# EAGLE board Qwiic_UV_Sensor_VEML6075-2-Panel (EAGLE 9.0.0)
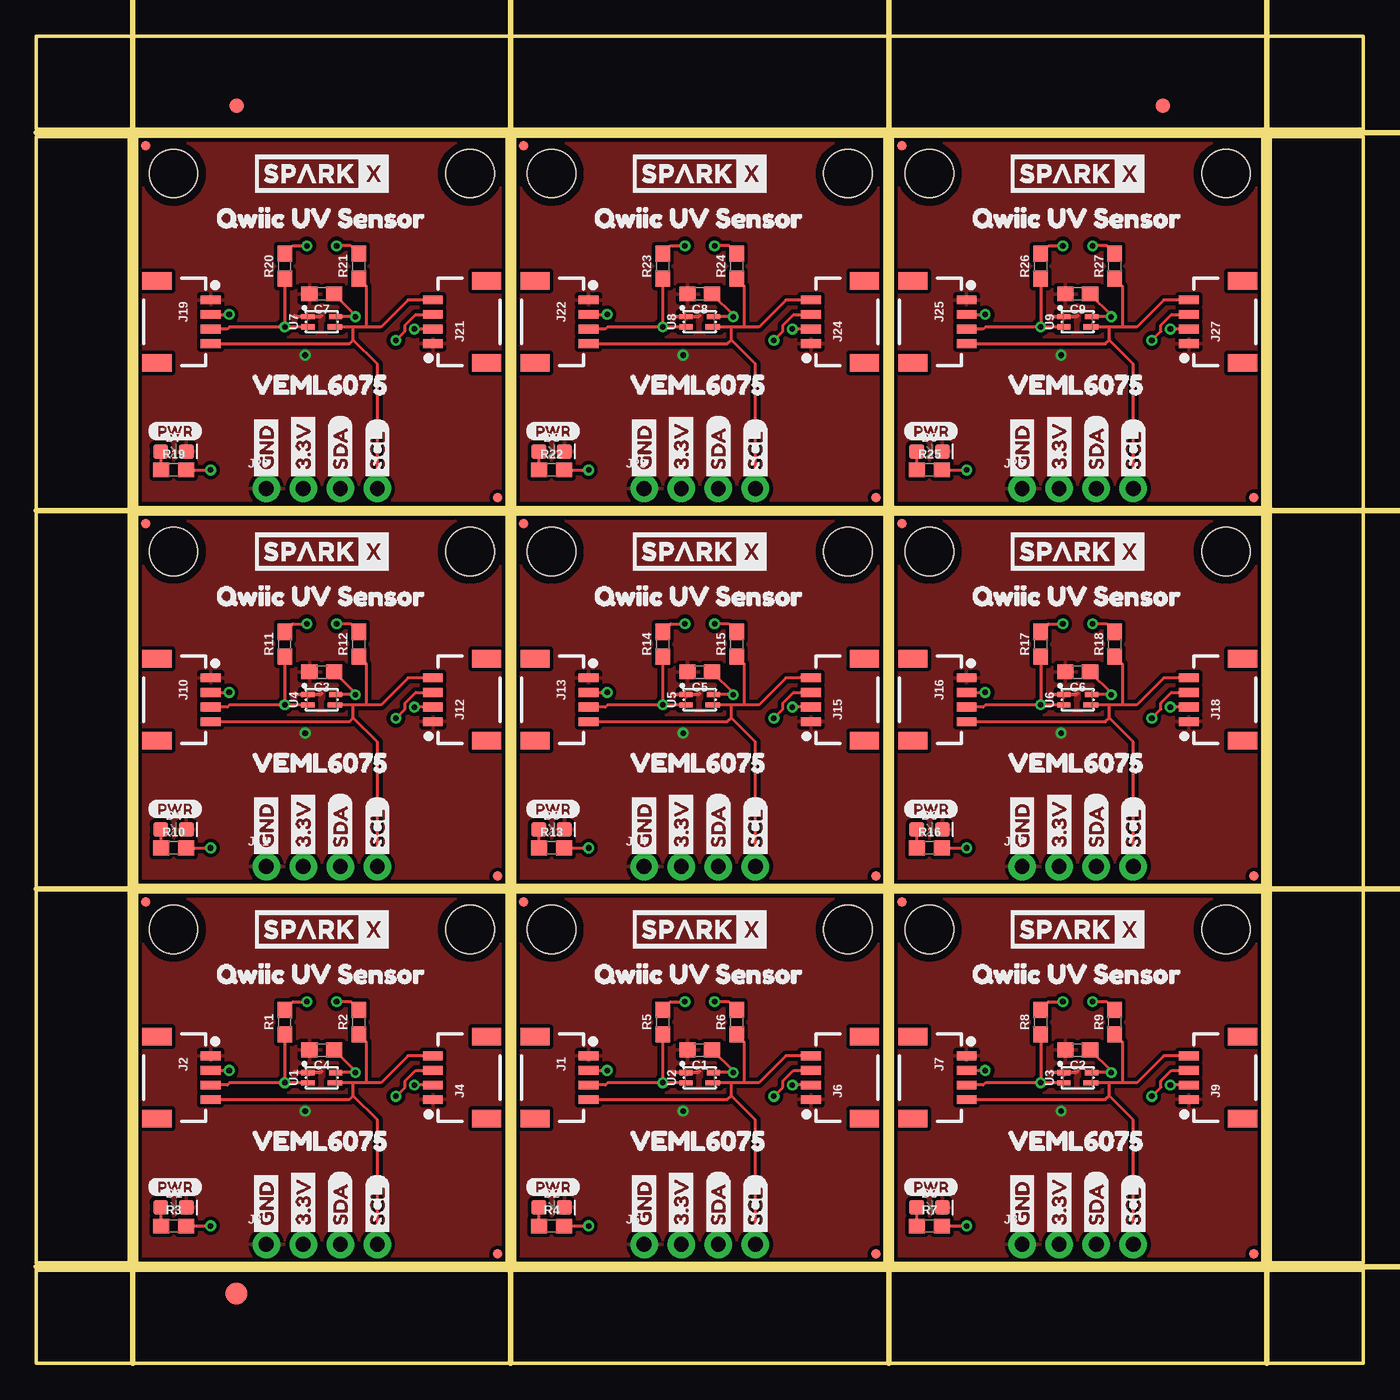
[diagram p0: board, top side]
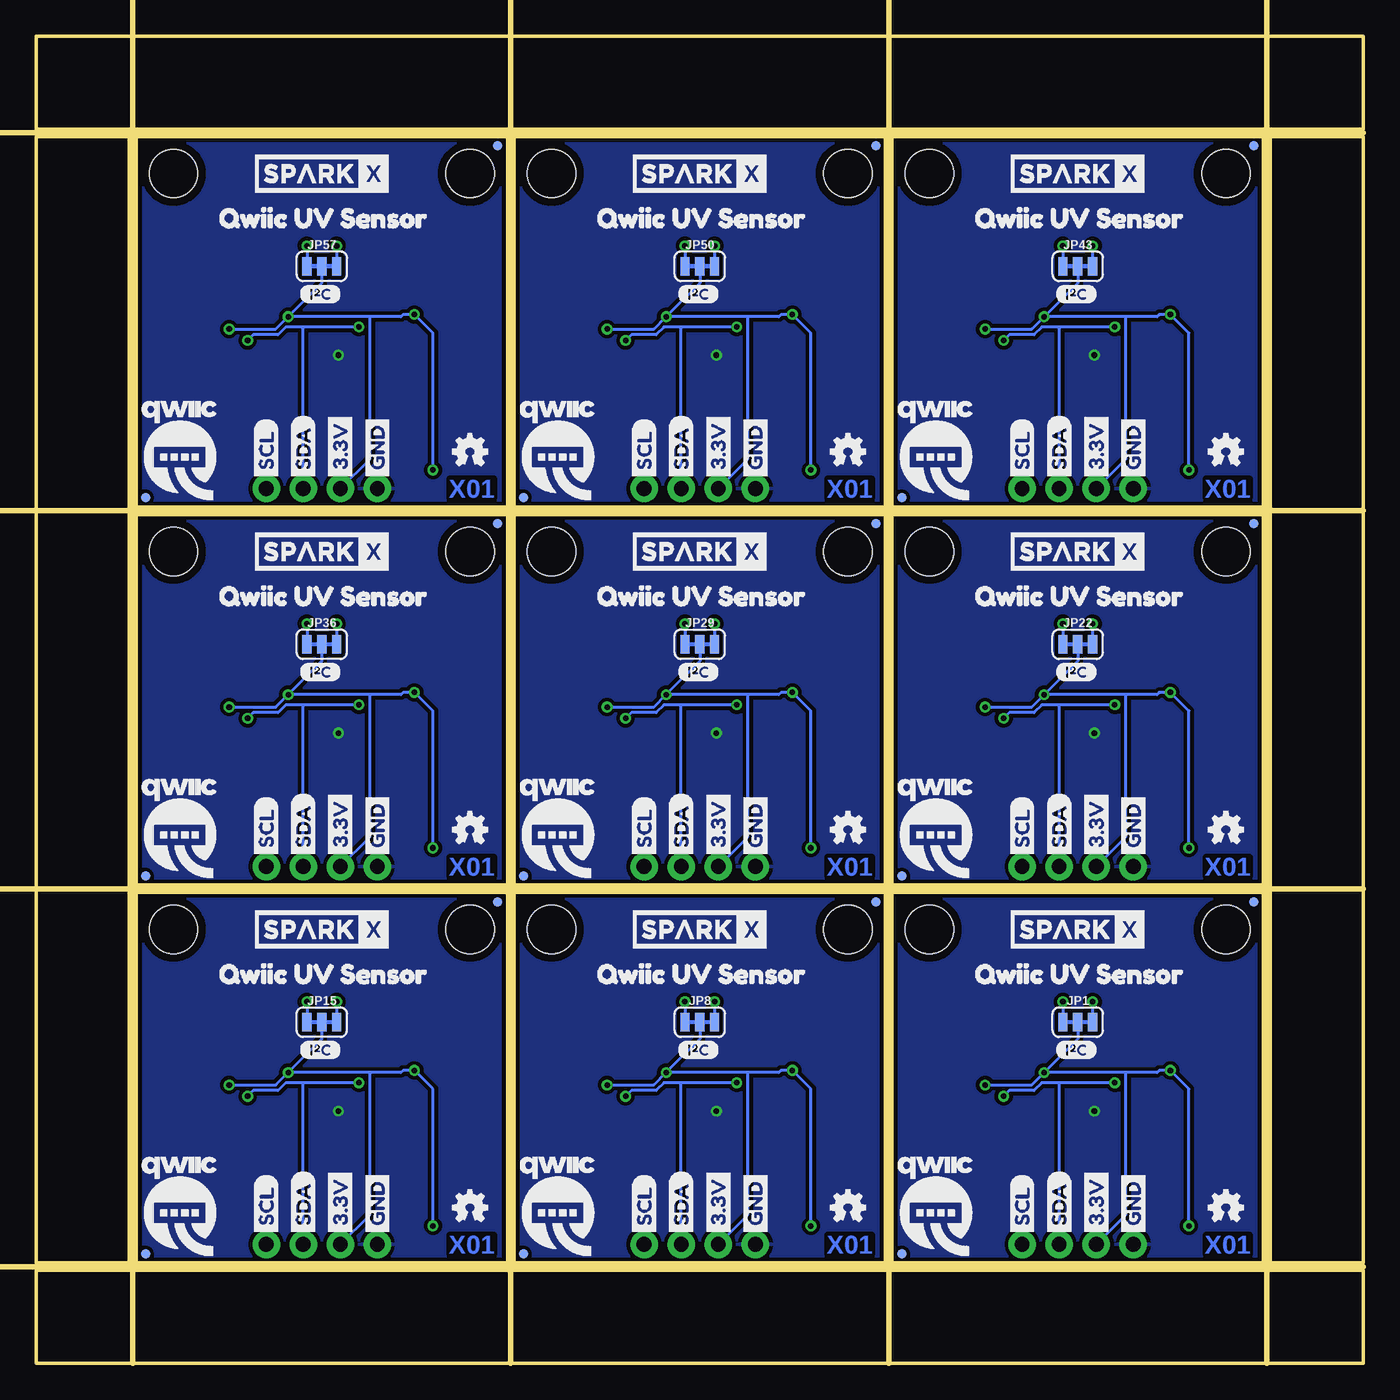
[diagram p1: board, bottom side, seen from below]

Size 90.93 x 90.93 mm. Coordinates in mm from the lower left corner, seen from the top.
Outline: 6.86,6.86 32.26,6.86 32.26,32.26 6.86,32.26 6.86,6.86
Outline: 32.77,6.86 58.17,6.86 58.17,32.26 32.77,32.26 32.77,6.86
Outline: 58.67,6.86 84.07,6.86 84.07,32.26 58.67,32.26 58.67,6.86
Outline: 6.86,32.77 32.26,32.77 32.26,58.17 6.86,58.17 6.86,32.77
Outline: 32.77,32.77 58.17,32.77 58.17,58.17 32.77,58.17 32.77,32.77
Outline: 58.67,32.77 84.07,32.77 84.07,58.17 58.67,58.17 58.67,32.77
Outline: 6.86,58.67 32.26,58.67 32.26,84.07 6.86,84.07 6.86,58.67
Outline: 32.77,58.67 58.17,58.67 58.17,84.07 32.77,84.07 32.77,58.67
Outline: 58.67,58.67 84.07,58.67 84.07,84.07 58.67,84.07 58.67,58.67
Outline: 0,6.35 90.93,6.35 90.93,0 0,0 0,6.35
Outline: 84.58,84.07 90.93,84.07 90.93,6.86 84.58,6.86 84.58,84.07
Outline: 0,90.93 90.93,90.93 90.93,84.58 0,84.58 0,90.93
Outline: 0,84.07 6.35,84.07 6.35,6.86 0,6.86 0,84.07
Copper layers (1*16): Top 0.035mm / dielectric 1.5mm / Bottom 0.035mm
Design rules "SparkFun-2-layer-PCBWay-LIMIT": minimum track width 6mil, minimum drill 0.3mm, track to track 6mil, track to pad 6mil, pad to pad 6mil, via to via 6mil, smd to smd 6mil, copper to edge 6mil, drill to drill 6mil, minimum pad ring 7mil, minimum via ring 7mil, stop-mask expansion 4mil, vias tented up to drill 25mil, thermal gap 10mil
Milling: 8 lines

## Footprints (pad centres in the part's own frame; a part is rotated, then mirrored left to right if it is on the bottom)
0603 = smd 1.1 x 1: 1 -0.85,0; 2 0.85,0
LED-0603 = smd 1 x 1: A -0.877,0; C 0.877,0
FIDUCIAL-1X2 = smd 1 x 1: 1 0,0
FIDUCIAL-1.5X3 = smd 1.5 x 1.5: 1 0,0
1X04_1MM_RA = smd 0.6 x 1.35: 1 -1.5,0; 2 -0.5,0; 3 0.5,0; 4 1.5,0 | smd 1.2 x 2: NC1 2.8,-3.675; NC2 -2.8,-3.675
1X04_NO_SILK = drill 1.016 pad 1.88: 1 0,0; 2 2.54,0; 3 5.08,0; 4 7.62,0
SMT-JUMPER_3_2-NC_TRACE_SILK = smd 0.635 x 1.27: 1 -1.016,0; 2 0,0; 3 1.016,0
MICRO-FIDUCIAL = smd 0.635 x 0.635: 1 0,0
STAND-OFF = hole 3.302: 0,0
VEML6075_A3OP = smd 0.9 x 0.35: 1 -0.95,0.35; 2 -0.95,-0.35; 4 0.95,0.35 | smd 1 x 0.35: 3 0.9,-0.35

## Placement (x,y rotation side)
C1  0.1uF  [0603]  45.47,21.46 180 top
C2  0.1uF  [0603]  71.37,21.46 180 top
C3  0.1uF  [0603]  19.56,47.37 180 top
C4  0.1uF  [0603]  19.56,21.46 180 top
C5  0.1uF  [0603]  45.47,47.37 180 top
C6  0.1uF  [0603]  71.37,47.37 180 top
C7  0.1uF  [0603]  19.56,73.28 180 top
C8  0.1uF  [0603]  45.47,73.28 180 top
C9  0.1uF  [0603]  71.37,73.28 180 top
D1  RED  [LED-0603]  9.4,10.67 0 top
D2  RED  [LED-0603]  35.31,10.67 0 top
D3  RED  [LED-0603]  61.21,10.67 0 top
D4  RED  [LED-0603]  9.4,36.58 0 top
D5  RED  [LED-0603]  35.31,36.58 0 top
D6  RED  [LED-0603]  61.21,36.58 0 top
D7  RED  [LED-0603]  9.4,62.48 0 top
D8  RED  [LED-0603]  35.31,62.48 0 top
D9  RED  [LED-0603]  61.21,62.48 0 top
E$1  [FIDUCIAL-1X2]  13.72,86.17 0 top
E$2  [FIDUCIAL-1X2]  77.22,86.17 0 top
E$3  [FIDUCIAL-1.5X3]  13.72,4.76 0 top
FRAME1  FRAME-LETTER  [CREATIVE_COMMONS]  -2.03,-4.57 0 top  (outside the outline)
FRAME2  FRAME-LETTER  [CREATIVE_COMMONS]  23.88,-4.57 0 top  (outside the outline)
FRAME3  FRAME-LETTER  [CREATIVE_COMMONS]  49.78,-4.57 0 top  (outside the outline)
FRAME4  FRAME-LETTER  [CREATIVE_COMMONS]  -2.03,21.34 0 top
FRAME5  FRAME-LETTER  [CREATIVE_COMMONS]  23.88,21.34 0 top
FRAME6  FRAME-LETTER  [CREATIVE_COMMONS]  49.78,21.34 0 top
J1  SMD  [1X04_1MM_RA]  37.85,19.56 270 top
J2  SMD  [1X04_1MM_RA]  11.94,19.56 270 top
J3  PTH  [1X04_NO_SILK]  15.75,8.13 0 top
J4  SMD  [1X04_1MM_RA]  27.18,19.56 90 top
J5  PTH  [1X04_NO_SILK]  41.66,8.13 0 top
J6  SMD  [1X04_1MM_RA]  53.09,19.56 90 top
J7  SMD  [1X04_1MM_RA]  63.75,19.56 270 top
J8  PTH  [1X04_NO_SILK]  67.56,8.13 0 top
J9  SMD  [1X04_1MM_RA]  78.99,19.56 90 top
J10  SMD  [1X04_1MM_RA]  11.94,45.47 270 top
J11  PTH  [1X04_NO_SILK]  15.75,34.04 0 top
J12  SMD  [1X04_1MM_RA]  27.18,45.47 90 top
J13  SMD  [1X04_1MM_RA]  37.85,45.47 270 top
J14  PTH  [1X04_NO_SILK]  41.66,34.04 0 top
J15  SMD  [1X04_1MM_RA]  53.09,45.47 90 top
J16  SMD  [1X04_1MM_RA]  63.75,45.47 270 top
J17  PTH  [1X04_NO_SILK]  67.56,34.04 0 top
J18  SMD  [1X04_1MM_RA]  78.99,45.47 90 top
J19  SMD  [1X04_1MM_RA]  11.94,71.37 270 top
J20  PTH  [1X04_NO_SILK]  15.75,59.94 0 top
J21  SMD  [1X04_1MM_RA]  27.18,71.37 90 top
J22  SMD  [1X04_1MM_RA]  37.85,71.37 270 top
J23  PTH  [1X04_NO_SILK]  41.66,59.94 0 top
J24  SMD  [1X04_1MM_RA]  53.09,71.37 90 top
J25  SMD  [1X04_1MM_RA]  63.75,71.37 270 top
J26  PTH  [1X04_NO_SILK]  67.56,59.94 0 top
J27  SMD  [1X04_1MM_RA]  78.99,71.37 90 top
JP1  I2C  [SMT-JUMPER_3_2-NC_TRACE_SILK]  19.56,23.37 0 bottom
JP2  FIDUCIALUFIDUCIAL  [MICRO-FIDUCIAL]  31.62,7.49 0 bottom
JP3  STAND-OFF  [STAND-OFF]  9.4,29.72 0 top
JP4  STAND-OFF  [STAND-OFF]  29.72,29.72 90 top
JP5  FIDUCIALUFIDUCIAL  [MICRO-FIDUCIAL]  31.62,7.49 0 top
JP6  FIDUCIALUFIDUCIAL  [MICRO-FIDUCIAL]  7.49,31.62 0 top
JP7  FIDUCIALUFIDUCIAL  [MICRO-FIDUCIAL]  7.49,31.62 0 bottom
JP8  I2C  [SMT-JUMPER_3_2-NC_TRACE_SILK]  45.47,23.37 0 bottom
JP9  STAND-OFF  [STAND-OFF]  35.31,29.72 0 top
JP10  STAND-OFF  [STAND-OFF]  55.63,29.72 90 top
JP11  FIDUCIALUFIDUCIAL  [MICRO-FIDUCIAL]  57.53,7.49 0 bottom
JP12  FIDUCIALUFIDUCIAL  [MICRO-FIDUCIAL]  33.4,31.62 0 top
JP13  FIDUCIALUFIDUCIAL  [MICRO-FIDUCIAL]  57.53,7.49 0 top
JP14  FIDUCIALUFIDUCIAL  [MICRO-FIDUCIAL]  33.4,31.62 0 bottom
JP15  I2C  [SMT-JUMPER_3_2-NC_TRACE_SILK]  71.37,23.37 0 bottom
JP16  STAND-OFF  [STAND-OFF]  61.21,29.72 0 top
JP17  STAND-OFF  [STAND-OFF]  81.53,29.72 90 top
JP18  FIDUCIALUFIDUCIAL  [MICRO-FIDUCIAL]  83.44,7.49 0 bottom
JP19  FIDUCIALUFIDUCIAL  [MICRO-FIDUCIAL]  59.31,31.62 0 top
JP20  FIDUCIALUFIDUCIAL  [MICRO-FIDUCIAL]  83.44,7.49 0 top
JP21  FIDUCIALUFIDUCIAL  [MICRO-FIDUCIAL]  59.31,31.62 0 bottom
JP22  I2C  [SMT-JUMPER_3_2-NC_TRACE_SILK]  19.56,49.28 0 bottom
JP23  STAND-OFF  [STAND-OFF]  9.4,55.63 0 top
JP24  STAND-OFF  [STAND-OFF]  29.72,55.63 90 top
JP25  FIDUCIALUFIDUCIAL  [MICRO-FIDUCIAL]  31.62,33.4 0 bottom
JP26  FIDUCIALUFIDUCIAL  [MICRO-FIDUCIAL]  7.49,57.53 0 top
JP27  FIDUCIALUFIDUCIAL  [MICRO-FIDUCIAL]  31.62,33.4 0 top
JP28  FIDUCIALUFIDUCIAL  [MICRO-FIDUCIAL]  7.49,57.53 0 bottom
JP29  I2C  [SMT-JUMPER_3_2-NC_TRACE_SILK]  45.47,49.28 0 bottom
JP30  STAND-OFF  [STAND-OFF]  35.31,55.63 0 top
JP31  STAND-OFF  [STAND-OFF]  55.63,55.63 90 top
JP32  FIDUCIALUFIDUCIAL  [MICRO-FIDUCIAL]  57.53,33.4 0 bottom
JP33  FIDUCIALUFIDUCIAL  [MICRO-FIDUCIAL]  33.4,57.53 0 top
JP34  FIDUCIALUFIDUCIAL  [MICRO-FIDUCIAL]  57.53,33.4 0 top
JP35  FIDUCIALUFIDUCIAL  [MICRO-FIDUCIAL]  33.4,57.53 0 bottom
JP36  I2C  [SMT-JUMPER_3_2-NC_TRACE_SILK]  71.37,49.28 0 bottom
JP37  STAND-OFF  [STAND-OFF]  61.21,55.63 0 top
JP38  STAND-OFF  [STAND-OFF]  81.53,55.63 90 top
JP39  FIDUCIALUFIDUCIAL  [MICRO-FIDUCIAL]  83.44,33.4 0 bottom
JP40  FIDUCIALUFIDUCIAL  [MICRO-FIDUCIAL]  59.31,57.53 0 top
JP41  FIDUCIALUFIDUCIAL  [MICRO-FIDUCIAL]  83.44,33.4 0 top
JP42  FIDUCIALUFIDUCIAL  [MICRO-FIDUCIAL]  59.31,57.53 0 bottom
JP43  I2C  [SMT-JUMPER_3_2-NC_TRACE_SILK]  19.56,75.18 0 bottom
JP44  STAND-OFF  [STAND-OFF]  9.4,81.53 0 top
JP45  STAND-OFF  [STAND-OFF]  29.72,81.53 90 top
JP46  FIDUCIALUFIDUCIAL  [MICRO-FIDUCIAL]  31.62,59.31 0 bottom
JP47  FIDUCIALUFIDUCIAL  [MICRO-FIDUCIAL]  7.49,83.44 0 top
JP48  FIDUCIALUFIDUCIAL  [MICRO-FIDUCIAL]  31.62,59.31 0 top
JP49  FIDUCIALUFIDUCIAL  [MICRO-FIDUCIAL]  7.49,83.44 0 bottom
JP50  I2C  [SMT-JUMPER_3_2-NC_TRACE_SILK]  45.47,75.18 0 bottom
JP51  STAND-OFF  [STAND-OFF]  35.31,81.53 0 top
JP52  STAND-OFF  [STAND-OFF]  55.63,81.53 90 top
JP53  FIDUCIALUFIDUCIAL  [MICRO-FIDUCIAL]  57.53,59.31 0 bottom
JP54  FIDUCIALUFIDUCIAL  [MICRO-FIDUCIAL]  33.4,83.44 0 top
JP55  FIDUCIALUFIDUCIAL  [MICRO-FIDUCIAL]  57.53,59.31 0 top
JP56  FIDUCIALUFIDUCIAL  [MICRO-FIDUCIAL]  33.4,83.44 0 bottom
JP57  I2C  [SMT-JUMPER_3_2-NC_TRACE_SILK]  71.37,75.18 0 bottom
JP58  STAND-OFF  [STAND-OFF]  61.21,81.53 0 top
JP59  STAND-OFF  [STAND-OFF]  81.53,81.53 90 top
JP60  FIDUCIALUFIDUCIAL  [MICRO-FIDUCIAL]  83.44,59.31 0 bottom
JP61  FIDUCIALUFIDUCIAL  [MICRO-FIDUCIAL]  59.31,83.44 0 top
JP62  FIDUCIALUFIDUCIAL  [MICRO-FIDUCIAL]  83.44,59.31 0 top
JP63  FIDUCIALUFIDUCIAL  [MICRO-FIDUCIAL]  59.31,83.44 0 bottom
LOGO1  OSHW-LOGOMINI  [OSHW-LOGO-MINI]  9.4,10.67 0 bottom
LOGO2  OSHW-LOGOMINI  [OSHW-LOGO-MINI]  35.31,10.67 0 bottom
LOGO3  OSHW-LOGOMINI  [OSHW-LOGO-MINI]  61.21,10.67 0 bottom
LOGO4  OSHW-LOGOMINI  [OSHW-LOGO-MINI]  9.4,36.58 0 bottom
LOGO5  OSHW-LOGOMINI  [OSHW-LOGO-MINI]  35.31,36.58 0 bottom
LOGO6  OSHW-LOGOMINI  [OSHW-LOGO-MINI]  61.21,36.58 0 bottom
LOGO7  OSHW-LOGOMINI  [OSHW-LOGO-MINI]  9.4,62.48 0 bottom
LOGO8  OSHW-LOGOMINI  [OSHW-LOGO-MINI]  35.31,62.48 0 bottom
LOGO9  OSHW-LOGOMINI  [OSHW-LOGO-MINI]  61.21,62.48 0 bottom
R1  2.2k  [0603]  17.02,23.37 90 top
R2  2.2k  [0603]  22.1,23.37 90 top
R3  1k  [0603]  9.4,9.4 0 top
R4  1k  [0603]  35.31,9.4 0 top
R5  2.2k  [0603]  42.93,23.37 90 top
R6  2.2k  [0603]  48.01,23.37 90 top
R7  1k  [0603]  61.21,9.4 0 top
R8  2.2k  [0603]  68.83,23.37 90 top
R9  2.2k  [0603]  73.91,23.37 90 top
R10  1k  [0603]  9.4,35.31 0 top
R11  2.2k  [0603]  17.02,49.28 90 top
R12  2.2k  [0603]  22.1,49.28 90 top
R13  1k  [0603]  35.31,35.31 0 top
R14  2.2k  [0603]  42.93,49.28 90 top
R15  2.2k  [0603]  48.01,49.28 90 top
R16  1k  [0603]  61.21,35.31 0 top
R17  2.2k  [0603]  68.83,49.28 90 top
R18  2.2k  [0603]  73.91,49.28 90 top
R19  1k  [0603]  9.4,61.21 0 top
R20  2.2k  [0603]  17.02,75.18 90 top
R21  2.2k  [0603]  22.1,75.18 90 top
R22  1k  [0603]  35.31,61.21 0 top
R23  2.2k  [0603]  42.93,75.18 90 top
R24  2.2k  [0603]  48.01,75.18 90 top
R25  1k  [0603]  61.21,61.21 0 top
R26  2.2k  [0603]  68.83,75.18 90 top
R27  2.2k  [0603]  73.91,75.18 90 top
U1  VEML6075  [VEML6075_A3OP]  19.56,19.56 0 top
U2  VEML6075  [VEML6075_A3OP]  45.47,19.56 0 top
U3  VEML6075  [VEML6075_A3OP]  71.37,19.56 0 top
U4  VEML6075  [VEML6075_A3OP]  19.56,45.47 0 top
U5  VEML6075  [VEML6075_A3OP]  45.47,45.47 0 top
U6  VEML6075  [VEML6075_A3OP]  71.37,45.47 0 top
U7  VEML6075  [VEML6075_A3OP]  19.56,71.37 0 top
U8  VEML6075  [VEML6075_A3OP]  45.47,71.37 0 top
U9  VEML6075  [VEML6075_A3OP]  71.37,71.37 0 top
U$1  SPARKX-LOGO4  [SPARKX-MEDIUM]  19.56,29.72 0 top
U$2  SPARKX-LOGO4  [SPARKX-MEDIUM]  19.56,29.72 0 bottom
U$3  [QWIIC-LOGO-MEDIUM]  29.34,10.79 0 bottom
U$4  [GND1]  15.75,8.51 90 bottom
U$5  [QWIIC_UV_SENSOR1]  11.18,26.67 0 top
U$6  [_VEML60750]  13.21,15.24 0 top
U$7  [3#3V2]  18.29,8.51 90 bottom
U$8  [SDA8]  20.83,8.51 90 bottom
U$9  [SCL9]  23.37,8.51 90 bottom
U$10  [I_SUPER2_C-()-03]  21.08,21.46 0 bottom
U$11  [QWIIC_UV_SENSOR1]  27.76,26.67 0 bottom
U$12  SPARKX-LOGO4  [SPARKX-MEDIUM]  45.47,29.72 0 bottom
U$13  SPARKX-LOGO4  [SPARKX-MEDIUM]  45.47,29.72 0 top
U$14  [QWIIC-LOGO-MEDIUM]  55.24,10.79 0 bottom
U$15  [3#3V2]  44.2,8.51 90 top
U$16  [PWR-()-03]  7.62,12.06 0 top
U$17  [GND1]  41.66,8.51 90 top
U$18  [SCL9]  49.28,8.51 90 top
U$19  [SDA8]  46.74,8.51 90 top
U$20  [I_SUPER2_C-()-03]  46.99,21.46 0 bottom
U$21  [3#3V2]  18.29,8.51 90 top
U$22  [GND1]  15.75,8.51 90 top
U$23  [PWR-()-03]  33.53,12.06 0 top
U$24  [_VEML60750]  39.12,15.24 0 top
U$25  [QWIIC_UV_SENSOR1]  37.08,26.67 0 top
U$26  [SCL9]  23.37,8.51 90 top
U$27  [SDA8]  20.83,8.51 90 top
U$28  [GND1]  41.66,8.51 90 bottom
U$29  [3#3V2]  44.2,8.51 90 bottom
U$30  [SDA8]  46.74,8.51 90 bottom
U$31  [SCL9]  49.28,8.51 90 bottom
U$32  [QWIIC_UV_SENSOR1]  53.67,26.67 0 bottom
U$33  SPARKX-LOGO4  [SPARKX-MEDIUM]  71.37,29.72 0 bottom
U$34  SPARKX-LOGO4  [SPARKX-MEDIUM]  71.37,29.72 0 top
U$35  [QWIIC-LOGO-MEDIUM]  81.15,10.79 0 bottom
U$36  [3#3V2]  70.1,8.51 90 top
U$37  [GND1]  67.56,8.51 90 top
U$38  [SCL9]  75.18,8.51 90 top
U$39  [SDA8]  72.64,8.51 90 top
U$40  [I_SUPER2_C-()-03]  72.9,21.46 0 bottom
U$41  [PWR-()-03]  59.44,12.06 0 top
U$42  [_VEML60750]  65.02,15.24 0 top
U$43  [QWIIC_UV_SENSOR1]  62.99,26.67 0 top
U$44  [GND1]  67.56,8.51 90 bottom
U$45  [3#3V2]  70.1,8.51 90 bottom
U$46  [SDA8]  72.64,8.51 90 bottom
U$47  [SCL9]  75.18,8.51 90 bottom
U$48  [QWIIC_UV_SENSOR1]  79.58,26.67 0 bottom
U$49  SPARKX-LOGO4  [SPARKX-MEDIUM]  19.56,55.63 0 bottom
U$50  SPARKX-LOGO4  [SPARKX-MEDIUM]  19.56,55.63 0 top
U$51  [QWIIC-LOGO-MEDIUM]  29.34,36.7 0 bottom
U$52  [3#3V2]  18.29,34.42 90 top
U$53  [GND1]  15.75,34.42 90 top
U$54  [SCL9]  23.37,34.42 90 top
U$55  [SDA8]  20.83,34.42 90 top
U$56  [I_SUPER2_C-()-03]  21.08,47.37 0 bottom
U$57  [PWR-()-03]  7.62,37.97 0 top
U$58  [_VEML60750]  13.21,41.15 0 top
U$59  [QWIIC_UV_SENSOR1]  11.18,52.58 0 top
U$60  [GND1]  15.75,34.42 90 bottom
U$61  [3#3V2]  18.29,34.42 90 bottom
U$62  [SDA8]  20.83,34.42 90 bottom
U$63  [SCL9]  23.37,34.42 90 bottom
U$64  [QWIIC_UV_SENSOR1]  27.76,52.58 0 bottom
U$65  SPARKX-LOGO4  [SPARKX-MEDIUM]  45.47,55.63 0 bottom
U$66  SPARKX-LOGO4  [SPARKX-MEDIUM]  45.47,55.63 0 top
U$67  [QWIIC-LOGO-MEDIUM]  55.24,36.7 0 bottom
U$68  [3#3V2]  44.2,34.42 90 top
U$69  [GND1]  41.66,34.42 90 top
U$70  [SCL9]  49.28,34.42 90 top
U$71  [SDA8]  46.74,34.42 90 top
U$72  [I_SUPER2_C-()-03]  46.99,47.37 0 bottom
U$73  [PWR-()-03]  33.53,37.97 0 top
U$74  [_VEML60750]  39.12,41.15 0 top
U$75  [QWIIC_UV_SENSOR1]  37.08,52.58 0 top
U$76  [GND1]  41.66,34.42 90 bottom
U$77  [3#3V2]  44.2,34.42 90 bottom
U$78  [SDA8]  46.74,34.42 90 bottom
U$79  [SCL9]  49.28,34.42 90 bottom
U$80  [QWIIC_UV_SENSOR1]  53.67,52.58 0 bottom
U$81  SPARKX-LOGO4  [SPARKX-MEDIUM]  71.37,55.63 0 bottom
U$82  SPARKX-LOGO4  [SPARKX-MEDIUM]  71.37,55.63 0 top
U$83  [QWIIC-LOGO-MEDIUM]  81.15,36.7 0 bottom
U$84  [3#3V2]  70.1,34.42 90 top
U$85  [GND1]  67.56,34.42 90 top
U$86  [SCL9]  75.18,34.42 90 top
U$87  [SDA8]  72.64,34.42 90 top
U$88  [I_SUPER2_C-()-03]  72.9,47.37 0 bottom
U$89  [PWR-()-03]  59.44,37.97 0 top
U$90  [_VEML60750]  65.02,41.15 0 top
U$91  [QWIIC_UV_SENSOR1]  62.99,52.58 0 top
U$92  [GND1]  67.56,34.42 90 bottom
U$93  [3#3V2]  70.1,34.42 90 bottom
U$94  [SDA8]  72.64,34.42 90 bottom
U$95  [SCL9]  75.18,34.42 90 bottom
U$96  [QWIIC_UV_SENSOR1]  79.58,52.58 0 bottom
U$97  SPARKX-LOGO4  [SPARKX-MEDIUM]  19.56,81.53 0 bottom
U$98  SPARKX-LOGO4  [SPARKX-MEDIUM]  19.56,81.53 0 top
U$99  [QWIIC-LOGO-MEDIUM]  29.34,62.61 0 bottom
U$100  [3#3V2]  18.29,60.32 90 top
U$101  [GND1]  15.75,60.32 90 top
U$102  [SCL9]  23.37,60.32 90 top
U$103  [SDA8]  20.83,60.32 90 top
U$104  [I_SUPER2_C-()-03]  21.08,73.28 0 bottom
U$105  [PWR-()-03]  7.62,63.88 0 top
U$106  [_VEML60750]  13.21,67.06 0 top
U$107  [QWIIC_UV_SENSOR1]  11.18,78.49 0 top
U$108  [GND1]  15.75,60.32 90 bottom
U$109  [3#3V2]  18.29,60.32 90 bottom
U$110  [SDA8]  20.83,60.32 90 bottom
U$111  [SCL9]  23.37,60.32 90 bottom
U$112  [QWIIC_UV_SENSOR1]  27.76,78.49 0 bottom
U$113  SPARKX-LOGO4  [SPARKX-MEDIUM]  45.47,81.53 0 bottom
U$114  SPARKX-LOGO4  [SPARKX-MEDIUM]  45.47,81.53 0 top
U$115  [QWIIC-LOGO-MEDIUM]  55.24,62.61 0 bottom
U$116  [3#3V2]  44.2,60.32 90 top
U$117  [GND1]  41.66,60.32 90 top
U$118  [SCL9]  49.28,60.32 90 top
U$119  [SDA8]  46.74,60.32 90 top
U$120  [I_SUPER2_C-()-03]  46.99,73.28 0 bottom
U$121  [PWR-()-03]  33.53,63.88 0 top
U$122  [_VEML60750]  39.12,67.06 0 top
U$123  [QWIIC_UV_SENSOR1]  37.08,78.49 0 top
U$124  [GND1]  41.66,60.32 90 bottom
U$125  [3#3V2]  44.2,60.32 90 bottom
U$126  [SDA8]  46.74,60.32 90 bottom
U$127  [SCL9]  49.28,60.32 90 bottom
U$128  [QWIIC_UV_SENSOR1]  53.67,78.49 0 bottom
U$129  SPARKX-LOGO4  [SPARKX-MEDIUM]  71.37,81.53 0 bottom
U$130  SPARKX-LOGO4  [SPARKX-MEDIUM]  71.37,81.53 0 top
U$131  [QWIIC-LOGO-MEDIUM]  81.15,62.61 0 bottom
U$132  [3#3V2]  70.1,60.32 90 top
U$133  [GND1]  67.56,60.32 90 top
U$134  [SCL9]  75.18,60.32 90 top
U$135  [SDA8]  72.64,60.32 90 top
U$136  [I_SUPER2_C-()-03]  72.9,73.28 0 bottom
U$137  [PWR-()-03]  59.44,63.88 0 top
U$138  [_VEML60750]  65.02,67.06 0 top
U$139  [QWIIC_UV_SENSOR1]  62.99,78.49 0 top
U$140  [GND1]  67.56,60.32 90 bottom
U$141  [3#3V2]  70.1,60.32 90 bottom
U$142  [SDA8]  72.64,60.32 90 bottom
U$143  [SCL9]  75.18,60.32 90 bottom
U$144  [QWIIC_UV_SENSOR1]  79.58,78.49 0 bottom

## Library data of the parts
C1-C9 = SparkFun-Capacitors; PROD_ID: CAP-00810
D1-D9 = SparkFun-LED; PROD_ID: DIO-00819
E$1 E$2 FRAME1-FRAME6 LOGO1-LOGO9 = SparkFun-Aesthetics
E$3 = SparkFun-Retired
J1-J27 U$1 U$2 U$12 U$13 U$33 U$34 U$49 U$50 U$65 U$66 U$81 U$82 U$97 U$98 U$113 U$114 U$129 U$130 = SparkX
JP1 JP8 JP15 JP22 JP29 JP36 JP43 JP50 JP57 = SparkFun-Jumpers
JP2-JP7 JP9-JP14 JP16-JP21 JP23-JP28 JP30-JP35 JP37-JP42 JP44-JP49 JP51-JP56 JP58-JP63 = SparkFun
R1 R2 R5 R6 R8 R9 R11 R12 R14 R15 R17 R18 R20 R21 R23 R24 R26 R27 = SparkFun-Resistors; PROD_ID: RES-08272
R3 R4 R7 R10 R13 R16 R19 R22 R25 = SparkFun-Resistors; PROD_ID: RES-07856
U1-U9 U$5 U$6 U$11 U$24 U$25 U$32 U$42 U$43 U$48 U$58 U$59 U$64 U$74 U$75 U$80 U$90 U$91 U$96 U$106 U$107 U$112 U$122 U$123 U$128 U$138 U$139 U$144 = Qwiic_UV_Sensor_VEML6075
U$3 U$10 U$14 U$16 U$20 U$23 U$35 U$40 U$41 U$51 U$56 U$57 U$67 U$72 U$73 U$83 U$88 U$89 U$99 U$104 U$105 U$115 U$120 U$121 U$131 U$136 U$137 = Labels
U$4 U$7-U$9 U$15 U$17-U$19 U$21 U$22 U$26-U$31 U$36-U$39 U$44-U$47 U$52-U$55 U$60-U$63 U$68-U$71 U$76-U$79 U$84-U$87 U$92-U$95 U$100-U$103 U$108-U$111 U$116-U$119 U$124-U$127 U$132-U$135 U$140-U$143 = Labels-0_04

## Nets
3.3V: C4.1 J2.2 J3.2 J4.2 JP1.2 R3.2 U1.4
3.3V1: C1.1 J1.2 J5.2 J6.2 JP8.2 R4.2 U2.4
3.3V2: C2.1 J7.2 J8.2 J9.2 JP15.2 R7.2 U3.4
3.3V3: C3.1 J10.2 J11.2 J12.2 JP22.2 R10.2 U4.4
3.3V4: C5.1 J13.2 J14.2 J15.2 JP29.2 R13.2 U5.4
3.3V5: C6.1 J16.2 J17.2 J18.2 JP36.2 R16.2 U6.4
3.3V6: C7.1 J19.2 J20.2 J21.2 JP43.2 R19.2 U7.4
3.3V7: C8.1 J22.2 J23.2 J24.2 JP50.2 R22.2 U8.4
3.3V8: C9.1 J25.2 J26.2 J27.2 JP57.2 R25.2 U9.4
GND: C4.2 D1.C J2.1 J3.1 J4.1 U1.1
GND1: C1.2 D2.C J1.1 J5.1 J6.1 U2.1
GND2: C2.2 D3.C J7.1 J8.1 J9.1 U3.1
GND3: C3.2 D4.C J10.1 J11.1 J12.1 U4.1
GND4: C5.2 D5.C J13.1 J14.1 J15.1 U5.1
GND5: C6.2 D6.C J16.1 J17.1 J18.1 U6.1
GND6: C7.2 D7.C J19.1 J20.1 J21.1 U7.1
GND7: C8.2 D8.C J22.1 J23.1 J24.1 U8.1
GND8: C9.2 D9.C J25.1 J26.1 J27.1 U9.1
N$1: D2.A R4.1
N$2: JP8.3 R5.2
N$3: D1.A R3.1
N$4: JP1.3 R1.2
N$5: JP1.1 R2.2
N$6: JP8.1 R6.2
N$7: D3.A R7.1
N$8: JP15.3 R8.2
N$9: JP15.1 R9.2
N$10: D4.A R10.1
N$11: JP22.3 R11.2
N$12: JP22.1 R12.2
N$13: D5.A R13.1
N$14: JP29.3 R14.2
N$15: JP29.1 R15.2
N$16: D6.A R16.1
N$17: JP36.3 R17.2
N$18: JP36.1 R18.2
N$19: D7.A R19.1
N$20: JP43.3 R20.2
N$21: JP43.1 R21.2
N$22: D8.A R22.1
N$23: JP50.3 R23.2
N$24: JP50.1 R24.2
N$25: D9.A R25.1
N$26: JP57.3 R26.2
N$27: JP57.1 R27.2
SCL: J2.4 J3.4 J4.4 R2.1 U1.3
SCL1: J1.4 J5.4 J6.4 R6.1 U2.3
SCL2: J7.4 J8.4 J9.4 R9.1 U3.3
SCL3: J10.4 J11.4 J12.4 R12.1 U4.3
SCL4: J13.4 J14.4 J15.4 R15.1 U5.3
SCL5: J16.4 J17.4 J18.4 R18.1 U6.3
SCL6: J19.4 J20.4 J21.4 R21.1 U7.3
SCL7: J22.4 J23.4 J24.4 R24.1 U8.3
SCL8: J25.4 J26.4 J27.4 R27.1 U9.3
SDA: J2.3 J3.3 J4.3 R1.1 U1.2
SDA1: J1.3 J5.3 J6.3 R5.1 U2.2
SDA2: J7.3 J8.3 J9.3 R8.1 U3.2
SDA3: J10.3 J11.3 J12.3 R11.1 U4.2
SDA4: J13.3 J14.3 J15.3 R14.1 U5.2
SDA5: J16.3 J17.3 J18.3 R17.1 U6.2
SDA6: J19.3 J20.3 J21.3 R20.1 U7.2
SDA7: J22.3 J23.3 J24.3 R23.1 U8.2
SDA8: J25.3 J26.3 J27.3 R26.1 U9.2

## Tracks (layer width: path | path; a pad name or v marks a point on that pad's centre or on a via)
3.3V  (via drill 0.38)
  Top 0.203: U1.4 v21.86,19.91 21.86,20.01 C4.1 | J4.2 v25.91,19.06 | J2.2 v13.21,20.06 | R3.2 v11.94,9.4
  Bottom 0.203: v25.91,19.06 22.71,19.06 v21.86,19.91 | 16.26,19.91 14.13,19.91 13.98,20.06 v13.21,20.06 11.94,18.79 v11.94,9.4 | 16.26,19.91 v21.86,19.91 | JP1.2 19.56,22.21 v21.86,19.91 | J3.2 16.26,10.16 16.26,19.91
3.3V1  (via drill 0.38)
  Top 0.203: U2.4 v47.77,19.91 47.77,20.01 C1.1 | J6.2 v51.82,19.06 | J1.2 v39.12,20.06 | R4.2 v37.85,9.4
  Bottom 0.203: v51.82,19.06 48.62,19.06 v47.77,19.91 | 42.16,19.91 40.04,19.91 39.89,20.06 v39.12,20.06 37.85,18.79 v37.85,9.4 | 42.16,19.91 v47.77,19.91 | JP8.2 45.47,22.21 v47.77,19.91 | J5.2 42.16,10.16 42.16,19.91
3.3V2  (via drill 0.38)
  Top 0.203: U3.4 v73.67,19.91 73.67,20.01 C2.1 | J9.2 v77.72,19.06 | J7.2 v65.02,20.06 | R7.2 v63.75,9.4
  Bottom 0.203: v77.72,19.06 74.52,19.06 v73.67,19.91 | 68.07,19.91 65.94,19.91 65.79,20.06 v65.02,20.06 63.75,18.79 v63.75,9.4 | 68.07,19.91 v73.67,19.91 | JP15.2 71.37,22.21 v73.67,19.91 | J8.2 68.07,10.16 68.07,19.91
3.3V3  (via drill 0.38)
  Top 0.203: U4.4 v21.86,45.82 21.86,45.92 C3.1 | J12.2 v25.91,44.97 | J10.2 v13.21,45.97 | R10.2 v11.94,35.31
  Bottom 0.203: v25.91,44.97 22.71,44.97 v21.86,45.82 | 16.26,45.82 14.13,45.82 13.98,45.97 v13.21,45.97 11.94,44.7 v11.94,35.31 | 16.26,45.82 v21.86,45.82 | JP22.2 19.56,48.12 v21.86,45.82 | J11.2 16.26,36.07 16.26,45.82
3.3V4  (via drill 0.38)
  Top 0.203: U5.4 v47.77,45.82 47.77,45.92 C5.1 | J15.2 v51.82,44.97 | J13.2 v39.12,45.97 | R13.2 v37.85,35.31
  Bottom 0.203: v51.82,44.97 48.62,44.97 v47.77,45.82 | 42.16,45.82 40.04,45.82 39.89,45.97 v39.12,45.97 37.85,44.7 v37.85,35.31 | 42.16,45.82 v47.77,45.82 | JP29.2 45.47,48.12 v47.77,45.82 | J14.2 42.16,36.07 42.16,45.82
3.3V5  (via drill 0.38)
  Top 0.203: U6.4 v73.67,45.82 73.67,45.92 C6.1 | J18.2 v77.72,44.97 | J16.2 v65.02,45.97 | R16.2 v63.75,35.31
  Bottom 0.203: v77.72,44.97 74.52,44.97 v73.67,45.82 | 68.07,45.82 65.94,45.82 65.79,45.97 v65.02,45.97 63.75,44.7 v63.75,35.31 | 68.07,45.82 v73.67,45.82 | JP36.2 71.37,48.12 v73.67,45.82 | J17.2 68.07,36.07 68.07,45.82
3.3V6  (via drill 0.38)
  Top 0.203: U7.4 v21.86,71.72 21.86,71.83 C7.1 | J21.2 v25.91,70.87 | J19.2 v13.21,71.87 | R19.2 v11.94,61.21
  Bottom 0.203: v25.91,70.87 22.71,70.87 v21.86,71.72 | 16.26,71.72 14.13,71.72 13.98,71.87 v13.21,71.87 11.94,70.6 v11.94,61.21 | 16.26,71.72 v21.86,71.72 | JP43.2 19.56,74.02 v21.86,71.72 | J20.2 16.26,61.98 16.26,71.72
3.3V7  (via drill 0.38)
  Top 0.203: U8.4 v47.77,71.72 47.77,71.83 C8.1 | J24.2 v51.82,70.87 | J22.2 v39.12,71.87 | R22.2 v37.85,61.21
  Bottom 0.203: v51.82,70.87 48.62,70.87 v47.77,71.72 | 42.16,71.72 40.04,71.72 39.89,71.87 v39.12,71.87 37.85,70.6 v37.85,61.21 | 42.16,71.72 v47.77,71.72 | JP50.2 45.47,74.02 v47.77,71.72 | J23.2 42.16,61.98 42.16,71.72
3.3V8  (via drill 0.38)
  Top 0.203: U9.4 v73.67,71.72 73.67,71.83 C9.1 | J27.2 v77.72,70.87 | J25.2 v65.02,71.87 | R25.2 v63.75,61.21
  Bottom 0.203: v77.72,70.87 74.52,70.87 v73.67,71.72 | 68.07,71.72 65.94,71.72 65.79,71.87 v65.02,71.87 63.75,70.6 v63.75,61.21 | 68.07,71.72 v73.67,71.72 | JP57.2 71.37,74.02 v73.67,71.72 | J26.2 68.07,61.98 68.07,71.72
GND  (via drill 0.38)
  Top 0.254: 17.7,19.99 17.79,19.91 U1.1 19.48,19.91 19.56,19.99
  other vias: 18.41,17.27
  pour Top (isolate 0.254): 6.86,32.26 6.86,6.86 32.26,6.86 32.26,32.26
  pour Bottom (isolate 0.254): 32.26,32.26 32.26,6.86 6.86,6.86 6.86,32.26
GND1  (via drill 0.38)
  Top 0.254: 43.61,19.99 43.69,19.91 U2.1 45.38,19.91 45.47,19.99
  other vias: 44.32,17.27
  pour Top (isolate 0.254): 32.77,32.26 32.77,6.86 58.17,6.86 58.17,32.26
  pour Bottom (isolate 0.254): 58.17,32.26 58.17,6.86 32.77,6.86 32.77,32.26
GND2  (via drill 0.38)
  Top 0.254: 69.52,19.99 69.6,19.91 U3.1 71.29,19.91 71.37,19.99
  other vias: 70.23,17.27
  pour Top (isolate 0.254): 58.67,32.26 58.67,6.86 84.07,6.86 84.07,32.26
  pour Bottom (isolate 0.254): 84.07,32.26 84.07,6.86 58.67,6.86 58.67,32.26
GND3  (via drill 0.38)
  Top 0.254: 17.7,45.9 17.79,45.82 U4.1 19.48,45.82 19.56,45.9
  other vias: 18.41,43.18
  pour Top (isolate 0.254): 6.86,58.17 6.86,32.77 32.26,32.77 32.26,58.17
  pour Bottom (isolate 0.254): 32.26,58.17 32.26,32.77 6.86,32.77 6.86,58.17
GND4  (via drill 0.38)
  Top 0.254: 43.61,45.9 43.69,45.82 U5.1 45.38,45.82 45.47,45.9
  other vias: 44.32,43.18
  pour Top (isolate 0.254): 32.77,58.17 32.77,32.77 58.17,32.77 58.17,58.17
  pour Bottom (isolate 0.254): 58.17,58.17 58.17,32.77 32.77,32.77 32.77,58.17
GND5  (via drill 0.38)
  Top 0.254: 69.52,45.9 69.6,45.82 U6.1 71.29,45.82 71.37,45.9
  other vias: 70.23,43.18
  pour Top (isolate 0.254): 58.67,58.17 58.67,32.77 84.07,32.77 84.07,58.17
  pour Bottom (isolate 0.254): 84.07,58.17 84.07,32.77 58.67,32.77 58.67,58.17
GND6  (via drill 0.38)
  Top 0.254: 17.7,71.81 17.79,71.72 U7.1 19.48,71.72 19.56,71.81
  other vias: 18.41,69.09
  pour Top (isolate 0.254): 6.86,84.07 6.86,58.67 32.26,58.67 32.26,84.07
  pour Bottom (isolate 0.254): 32.26,84.07 32.26,58.67 6.86,58.67 6.86,84.07
GND7  (via drill 0.38)
  Top 0.254: 43.61,71.81 43.69,71.72 U8.1 45.38,71.72 45.47,71.81
  other vias: 44.32,69.09
  pour Top (isolate 0.254): 32.77,84.07 32.77,58.67 58.17,58.67 58.17,84.07
  pour Bottom (isolate 0.254): 58.17,84.07 58.17,58.67 32.77,58.67 32.77,84.07
GND8  (via drill 0.38)
  Top 0.254: 69.52,71.81 69.6,71.72 U9.1 71.29,71.72 71.37,71.81
  other vias: 70.23,69.09
  pour Top (isolate 0.254): 58.67,84.07 58.67,58.67 84.07,58.67 84.07,84.07
  pour Bottom (isolate 0.254): 84.07,84.07 84.07,58.67 58.67,58.67 58.67,84.07
N$1
  Top 0.203: R4.1 34.46,10.64 D2.A
N$2  (via drill 0.38)
  Top 0.203: R5.2 43.47,24.77 v44.45,24.77
  Bottom 0.203: v44.45,24.77 JP8.3
N$3
  Top 0.203: R3.1 8.55,10.64 D1.A
N$4  (via drill 0.38)
  Top 0.203: R1.2 17.57,24.77 v18.54,24.77
  Bottom 0.203: v18.54,24.77 JP1.3
N$5  (via drill 0.38)
  Top 0.203: R2.2 21.55,24.77 v20.57,24.77
  Bottom 0.203: v20.57,24.77 JP1.1
N$6  (via drill 0.38)
  Top 0.203: R6.2 47.46,24.77 v46.48,24.77
  Bottom 0.203: v46.48,24.77 JP8.1
N$7
  Top 0.203: R7.1 60.36,10.64 D3.A
N$8  (via drill 0.38)
  Top 0.203: R8.2 69.38,24.77 v70.36,24.77
  Bottom 0.203: v70.36,24.77 JP15.3
N$9  (via drill 0.38)
  Top 0.203: R9.2 73.37,24.77 v72.39,24.77
  Bottom 0.203: v72.39,24.77 JP15.1
N$10
  Top 0.203: R10.1 8.55,36.55 D4.A
N$11  (via drill 0.38)
  Top 0.203: R11.2 17.57,50.67 v18.54,50.67
  Bottom 0.203: v18.54,50.67 JP22.3
N$12  (via drill 0.38)
  Top 0.203: R12.2 21.55,50.67 v20.57,50.67
  Bottom 0.203: v20.57,50.67 JP22.1
N$13
  Top 0.203: R13.1 34.46,36.55 D5.A
N$14  (via drill 0.38)
  Top 0.203: R14.2 43.47,50.67 v44.45,50.67
  Bottom 0.203: v44.45,50.67 JP29.3
N$15  (via drill 0.38)
  Top 0.203: R15.2 47.46,50.67 v46.48,50.67
  Bottom 0.203: v46.48,50.67 JP29.1
N$16
  Top 0.203: R16.1 60.36,36.55 D6.A
N$17  (via drill 0.38)
  Top 0.203: R17.2 69.38,50.67 v70.36,50.67
  Bottom 0.203: v70.36,50.67 JP36.3
N$18  (via drill 0.38)
  Top 0.203: R18.2 73.37,50.67 v72.39,50.67
  Bottom 0.203: v72.39,50.67 JP36.1
N$19
  Top 0.203: R19.1 8.55,62.46 D7.A
N$20  (via drill 0.38)
  Top 0.203: R20.2 17.57,76.58 v18.54,76.58
  Bottom 0.203: v18.54,76.58 JP43.3
N$21  (via drill 0.38)
  Top 0.203: R21.2 21.55,76.58 v20.57,76.58
  Bottom 0.203: v20.57,76.58 JP43.1
N$22
  Top 0.203: R22.1 34.46,62.46 D8.A
N$23  (via drill 0.38)
  Top 0.203: R23.2 43.47,76.58 v44.45,76.58
  Bottom 0.203: v44.45,76.58 JP50.3
N$24  (via drill 0.38)
  Top 0.203: R24.2 47.46,76.58 v46.48,76.58
  Bottom 0.203: v46.48,76.58 JP50.1
N$25
  Top 0.203: R25.1 60.36,62.46 D9.A
N$26  (via drill 0.38)
  Top 0.203: R26.2 69.38,76.58 v70.36,76.58
  Bottom 0.203: v70.36,76.58 JP57.3
N$27  (via drill 0.38)
  Top 0.203: R27.2 73.37,76.58 v72.39,76.58
  Bottom 0.203: v72.39,76.58 JP57.1
SCL
  Top 0.203: 21.72,18.32 21.72,19.21 | J2.4 21.46,18.06 21.72,18.32 | 22.61,19.21 23.61,19.21 25.46,21.06 J4.4 | 22.61,19.21 21.72,19.21 | 21.72,19.21 U1.3 | R2.1 22.61,22.01 22.61,19.21 | J3.4 23.37,16.67 21.72,18.32
SCL1
  Top 0.203: 47.62,18.32 47.62,19.21 | J1.4 47.37,18.06 47.62,18.32 | 48.51,19.21 49.52,19.21 51.37,21.06 J6.4 | 48.51,19.21 47.62,19.21 | 47.62,19.21 U2.3 | R6.1 48.51,22.01 48.51,19.21 | J5.4 49.28,16.67 47.62,18.32
SCL2
  Top 0.203: 73.53,18.32 73.53,19.21 | J7.4 73.27,18.06 73.53,18.32 | 74.42,19.21 75.42,19.21 77.27,21.06 J9.4 | 74.42,19.21 73.53,19.21 | 73.53,19.21 U3.3 | R9.1 74.42,22.01 74.42,19.21 | J8.4 75.18,16.67 73.53,18.32
SCL3
  Top 0.203: 21.72,44.22 21.72,45.12 | J10.4 21.46,43.97 21.72,44.22 | 22.61,45.12 23.61,45.12 25.46,46.97 J12.4 | 22.61,45.12 21.72,45.12 | 21.72,45.12 U4.3 | R12.1 22.61,47.92 22.61,45.12 | J11.4 23.37,42.57 21.72,44.22
SCL4
  Top 0.203: 47.62,44.22 47.62,45.12 | J13.4 47.37,43.97 47.62,44.22 | 48.51,45.12 49.52,45.12 51.37,46.97 J15.4 | 48.51,45.12 47.62,45.12 | 47.62,45.12 U5.3 | R15.1 48.51,47.92 48.51,45.12 | J14.4 49.28,42.57 47.62,44.22
SCL5
  Top 0.203: 73.53,44.22 73.53,45.12 | J16.4 73.27,43.97 73.53,44.22 | 74.42,45.12 75.42,45.12 77.27,46.97 J18.4 | 74.42,45.12 73.53,45.12 | 73.53,45.12 U6.3 | R18.1 74.42,47.92 74.42,45.12 | J17.4 75.18,42.57 73.53,44.22
SCL6
  Top 0.203: 21.72,70.13 21.72,71.02 | J19.4 21.46,69.87 21.72,70.13 | 22.61,71.02 23.61,71.02 25.46,72.87 J21.4 | 22.61,71.02 21.72,71.02 | 21.72,71.02 U7.3 | R21.1 22.61,73.83 22.61,71.02 | J20.4 23.37,68.48 21.72,70.13
SCL7
  Top 0.203: 47.62,70.13 47.62,71.02 | J22.4 47.37,69.87 47.62,70.13 | 48.51,71.02 49.52,71.02 51.37,72.87 J24.4 | 48.51,71.02 47.62,71.02 | 47.62,71.02 U8.3 | R24.1 48.51,73.83 48.51,71.02 | J23.4 49.28,68.48 47.62,70.13
SCL8
  Top 0.203: 73.53,70.13 73.53,71.02 | J25.4 73.27,69.87 73.53,70.13 | 74.42,71.02 75.42,71.02 77.27,72.87 J27.4 | 74.42,71.02 73.53,71.02 | 73.53,71.02 U9.3 | R27.1 74.42,73.83 74.42,71.02 | J26.4 75.18,68.48 73.53,70.13
SDA  (via drill 0.38)
  Top 0.203: v17.02,19.21 13.24,19.21 13.09,19.06 J2.3 | R1.1 v17.02,19.21 | v24.64,18.29 25.26,18.91 25.26,19.33 25.99,20.06 J4.3 | U1.2 v17.02,19.21
  Bottom 0.203: v17.02,19.21 20.83,19.21 | 20.83,19.21 22.02,19.21 22.55,18.68 24.25,18.68 v24.64,18.29 | J3.3 20.83,19.21
SDA1  (via drill 0.38)
  Top 0.203: v42.93,19.21 39.15,19.21 39,19.06 J1.3 | R5.1 v42.93,19.21 | v50.55,18.29 51.17,18.91 51.17,19.33 51.9,20.06 J6.3 | U2.2 v42.93,19.21
  Bottom 0.203: v42.93,19.21 46.74,19.21 | 46.74,19.21 47.93,19.21 48.46,18.68 50.16,18.68 v50.55,18.29 | J5.3 46.74,19.21
SDA2  (via drill 0.38)
  Top 0.203: v68.83,19.21 65.06,19.21 64.91,19.06 J7.3 | R8.1 v68.83,19.21 | v76.45,18.29 77.08,18.91 77.08,19.33 77.81,20.06 J9.3 | U3.2 v68.83,19.21
  Bottom 0.203: v68.83,19.21 72.64,19.21 | 72.64,19.21 73.84,19.21 74.37,18.68 76.06,18.68 v76.45,18.29 | J8.3 72.64,19.21
SDA3  (via drill 0.38)
  Top 0.203: v17.02,45.12 13.24,45.12 13.09,44.97 J10.3 | R11.1 v17.02,45.12 | v24.64,44.2 25.26,44.82 25.26,45.23 25.99,45.97 J12.3 | U4.2 v17.02,45.12
  Bottom 0.203: v17.02,45.12 20.83,45.12 | 20.83,45.12 22.02,45.12 22.55,44.58 24.25,44.58 v24.64,44.2 | J11.3 20.83,45.12
SDA4  (via drill 0.38)
  Top 0.203: v42.93,45.12 39.15,45.12 39,44.97 J13.3 | R14.1 v42.93,45.12 | v50.55,44.2 51.17,44.82 51.17,45.23 51.9,45.97 J15.3 | U5.2 v42.93,45.12
  Bottom 0.203: v42.93,45.12 46.74,45.12 | 46.74,45.12 47.93,45.12 48.46,44.58 50.16,44.58 v50.55,44.2 | J14.3 46.74,45.12
SDA5  (via drill 0.38)
  Top 0.203: v68.83,45.12 65.06,45.12 64.91,44.97 J16.3 | R17.1 v68.83,45.12 | v76.45,44.2 77.08,44.82 77.08,45.23 77.81,45.97 J18.3 | U6.2 v68.83,45.12
  Bottom 0.203: v68.83,45.12 72.64,45.12 | 72.64,45.12 73.84,45.12 74.37,44.58 76.06,44.58 v76.45,44.2 | J17.3 72.64,45.12
SDA6  (via drill 0.38)
  Top 0.203: v17.02,71.02 13.24,71.02 13.09,70.87 J19.3 | R20.1 v17.02,71.02 | v24.64,70.1 25.26,70.73 25.26,71.14 25.99,71.87 J21.3 | U7.2 v17.02,71.02
  Bottom 0.203: v17.02,71.02 20.83,71.02 | 20.83,71.02 22.02,71.02 22.55,70.49 24.25,70.49 v24.64,70.1 | J20.3 20.83,71.02
SDA7  (via drill 0.38)
  Top 0.203: v42.93,71.02 39.15,71.02 39,70.87 J22.3 | R23.1 v42.93,71.02 | v50.55,70.1 51.17,70.73 51.17,71.14 51.9,71.87 J24.3 | U8.2 v42.93,71.02
  Bottom 0.203: v42.93,71.02 46.74,71.02 | 46.74,71.02 47.93,71.02 48.46,70.49 50.16,70.49 v50.55,70.1 | J23.3 46.74,71.02
SDA8  (via drill 0.38)
  Top 0.203: v68.83,71.02 65.06,71.02 64.91,70.87 J25.3 | R26.1 v68.83,71.02 | v76.45,70.1 77.08,70.73 77.08,71.14 77.81,71.87 J27.3 | U9.2 v68.83,71.02
  Bottom 0.203: v68.83,71.02 72.64,71.02 | 72.64,71.02 73.84,71.02 74.37,70.49 76.06,70.49 v76.45,70.1 | J26.3 72.64,71.02

## Text on the board
Bottom: X01 | X01 | X01 | X01 | X01 | X01 | X01 | X01 | X01
Milling: v-score | v-score | v-score | v-score | v-score | v-score | v-score | v-score
tDocu: Jim Lindblom | Jim Lindblom | Jim Lindblom | Jim Lindblom | Jim Lindblom | Jim Lindblom